# EAGLE board PIC Uhrfinal (EAGLE 7.5.0)
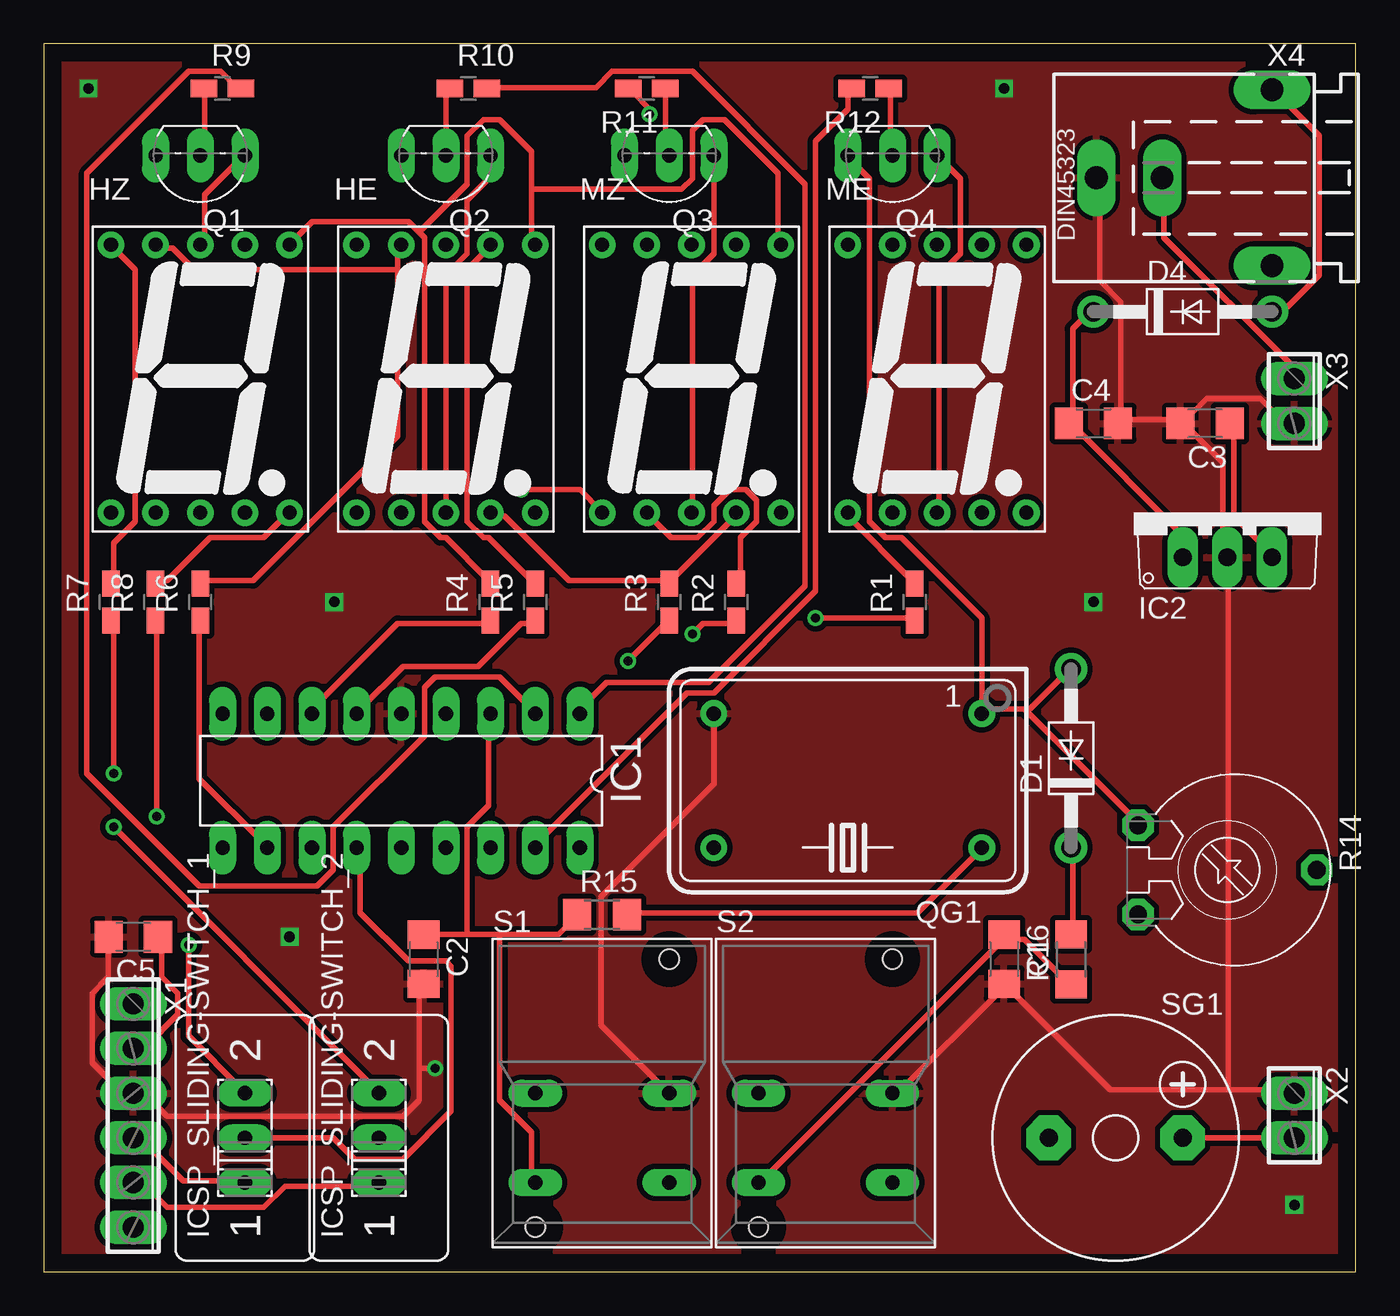
[diagram p0: board, top side]
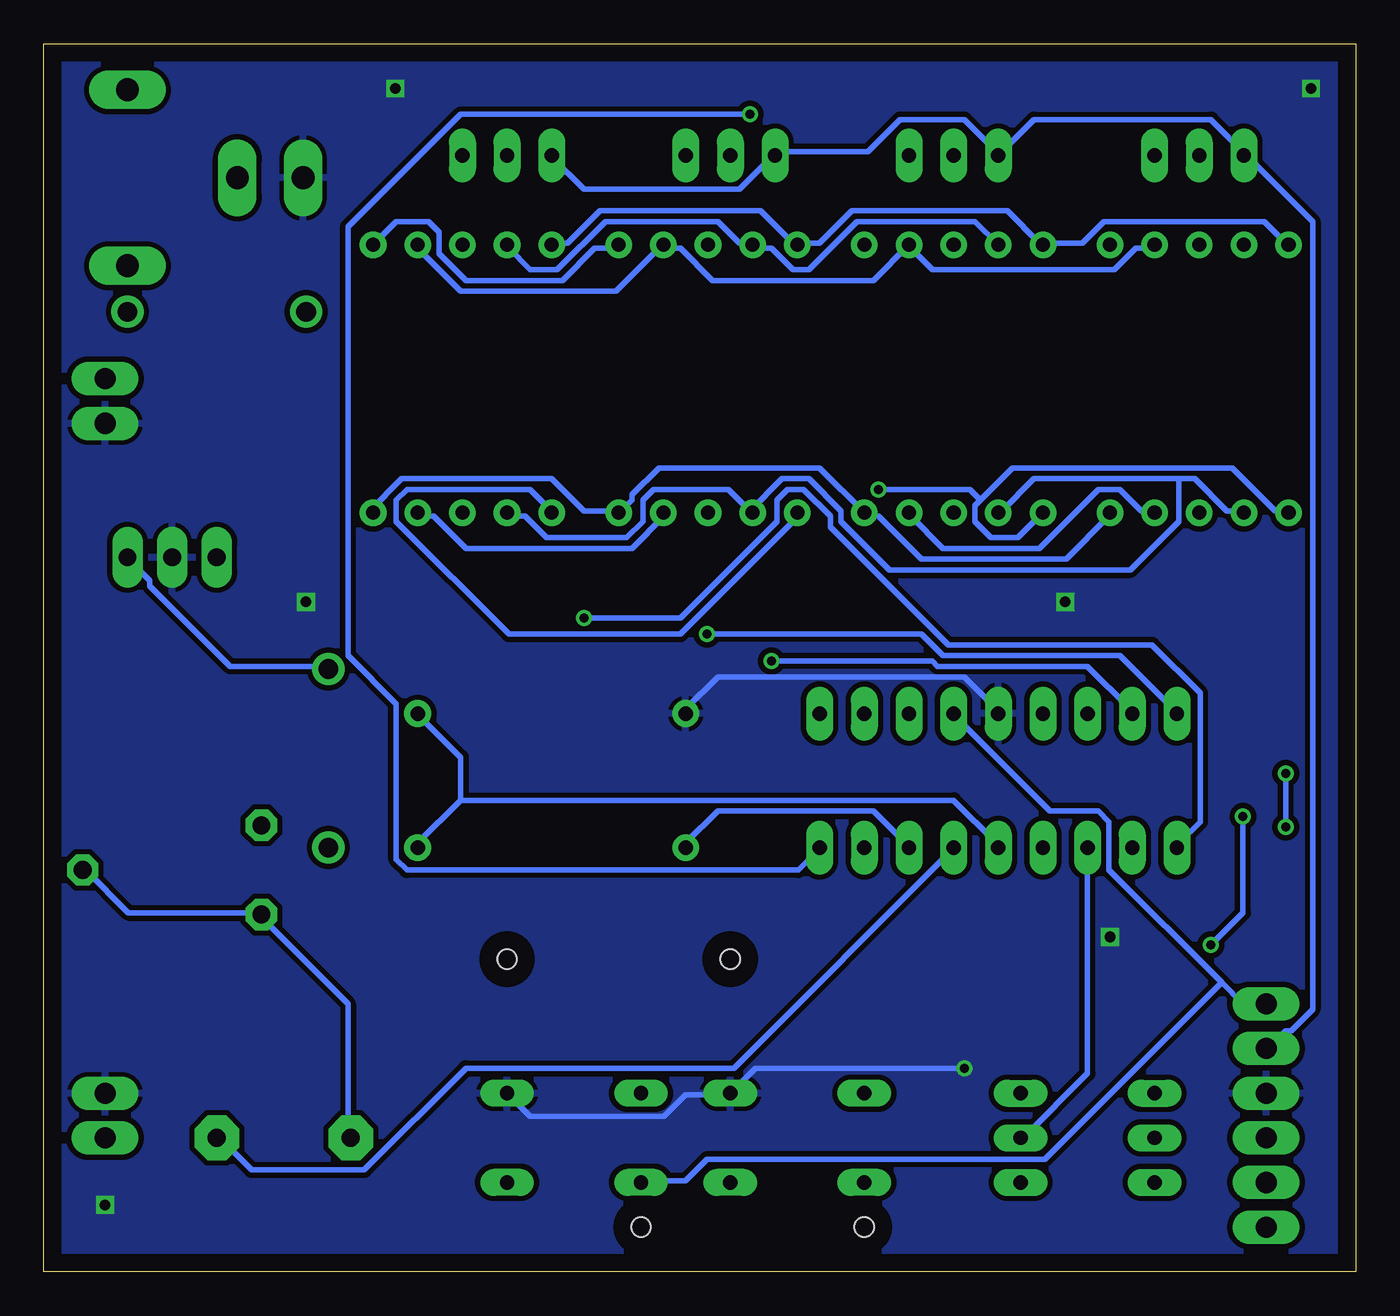
[diagram p1: board, bottom side, seen from below]

Size 74.6 x 69.84 mm. Coordinates in mm from the lower left corner, seen from the top.
Outline: 0,0 74.6,0 74.6,69.84 0,69.84 0,0
Copper layers (1*16): Top 0.035mm / dielectric 1.5mm / Bottom 0.035mm
Design rules "default *": minimum track width 12mil, minimum drill 20mil, track to track 12mil, track to pad 10mil, pad to pad 10mil, via to via 10mil, smd to smd 8mil, copper to edge 40mil, drill to drill 8mil, minimum pad ring 14mil, minimum via ring 8mil, stop-mask expansion 4mil, vias tented up to drill 0mil, thermal gap 10mil

## Footprints (pad centres in the part's own frame; a part is rotated, then mirrored left to right if it is on the bottom)
C1206 = smd 1.6 x 1.8: 1 -1.4,0; 2 1.4,0
DO41-10 = drill 1.118: A 5.08,0; C -5.08,0
SA52-11 = drill 0.8: 1 -5.08,-7.62; 2 -2.54,-7.62; 3 0,-7.62; 4 2.54,-7.62; 5 5.08,-7.62; 6 5.08,7.62; 7 2.54,7.62; 8 0,7.62; 9 -2.54,7.62; 10 -5.08,7.62
DIL18 = drill 0.813 long: 1 -10.16,-3.81; 2 -7.62,-3.81; 3 -5.08,-3.81; 4 -2.54,-3.81; 5 0,-3.81; 6 2.54,-3.81; 7 5.08,-3.81; 8 7.62,-3.81; 9 10.16,-3.81; 10 10.16,3.81; 11 7.62,3.81; 12 5.08,3.81; 13 2.54,3.81; 14 0,3.81; 15 -2.54,3.81; 16 -5.08,3.81; 17 -7.62,3.81; 18 -10.16,3.81
TO220V = drill 1.016 long: 1 -2.54,-2.54; 2 0,-2.54; 3 2.54,-2.54
M251 = drill 0.813 long: 1 -2.54,0; 2 0,0; 3 2.54,0
TO92-EBC = drill 0.813 long: B 0,-1.27; C -2.54,-1.27; E 2.54,-1.27
DIL14S = drill 0.813: 1 -7.62,-3.81; 7 7.62,-3.81; 8 7.62,3.81; 14 -7.62,3.81
R0805W = smd 1.5 x 1: 1 -1.052,0; 2 1.052,0
PT-10 = drill 1.016 pad 1.778 octagon: 1 -2.54,-5.08; 2 2.54,-5.08; 3 0,5.08
R1206 = smd 1.6 x 1.803: 1 -1.422,0; 2 1.422,0
SRK = drill 0.813 long: 1 -3.81,-5.08; 2 -3.81,0; 3 3.81,0; 4 3.81,-5.08 | hole 1.118: -3.81,-7.62; 3.81,7.62
F/CM12P = drill 1.016 pad 2.54 octagon: + 3.81,0; - -3.81,0
6POL254 = drill 1.2 pad 1.778 long: 1 -6.35,0; 2 -3.81,0; 3 -1.27,0; 4 1.27,0; 5 3.81,0; 6 6.35,0
2POL254 = drill 1.2 long: 1 -1.27,0; 2 1.27,0
737992-5 = drill 1.3 pad 2.184 long: + 0,10; -1 5,0; -2 -5,0; K 0,6.25

## Placement (x,y rotation side)
C1  100n  [C1206]  54.61,17.78 270 top
C2  100n  [C1206]  21.59,17.78 270 top
C3  0,33µ  [C1206]  66.04,48.26 180 top
C4  0,33µ  [C1206]  59.69,48.26 0 top
C5  100n  [C1206]  5.08,19.05 180 top
D1  BAT49  [DO41-10]  58.42,29.21 90 top
D4  BAT49  [DO41-10]  64.77,54.61 0 top
HE  7-SEG_SA52-11  [SA52-11]  22.86,50.8 0 top
HZ  7-SEG_SA52-11  [SA52-11]  8.89,50.8 0 top
IC1  PIC16F1826/27P  [DIL18]  20.32,27.94 180 top
IC2  7805TV  [TO220V]  67.31,43.18 0 top
ICSP_SLIDING-SWITCH_1  _1  [M251]  11.43,7.62 90 top
ICSP_SLIDING-SWITCH_2  _2  [M251]  19.05,7.62 90 top
ME  7-SEG_SA52-11  [SA52-11]  50.8,50.8 0 top
MZ  7-SEG_SA52-11  [SA52-11]  36.83,50.8 0 top
Q1  BC557B  [TO92-EBC]  8.89,62.23 180 top
Q2  BC557B  [TO92-EBC]  22.86,62.23 180 top
Q3  BC557B  [TO92-EBC]  35.56,62.23 180 top
Q4  BC557B  [TO92-EBC]  48.26,62.23 180 top
QG1  8 Mhz  [DIL14S]  45.72,27.94 180 top
R1  1,5k  [R0805W]  49.53,38.1 90 top
R2  1,5k  [R0805W]  39.37,38.1 90 top
R3  1,5k  [R0805W]  35.56,38.1 90 top
R4  1,5k  [R0805W]  25.4,38.1 90 top
R5  1,5k  [R0805W]  27.94,38.1 90 top
R6  1,5k  [R0805W]  8.89,38.1 90 top
R7  1,5k  [R0805W]  3.81,38.1 90 top
R8  1,5k  [R0805W]  6.35,38.1 90 top
R9  2k  [R0805W]  10.16,67.31 0 top
R10  2k  [R0805W]  24.13,67.31 0 top
R11  2k  [R0805W]  34.29,67.31 180 top
R12  2k  [R0805W]  46.99,67.31 180 top
R14  25k  [PT-10]  67.31,22.86 270 top
R15  10k  [R1206]  31.75,20.32 0 top
R16  10k  [R1206]  58.42,17.78 90 top
S1  SRK  [SRK]  31.75,10.16 0 top
S2  SRK  [SRK]  44.45,10.16 0 top
SG1  F/CM12P  [F/CM12P]  60.96,7.62 0 top
X1  [6POL254]  5.08,8.89 270 top
X2  [2POL254]  71.12,8.89 270 top
X3  +9V  [2POL254]  71.12,49.53 270 top
X4  +9V  [737992-5]  69.85,62.23 90 top

## Library data of the parts
C1-C5 R1-R12 R14-R16 = rcl
D1 D4 = diode
HE HZ ME MZ = display-kingbright; OC_FARNELL: unknown; OC_NEWARK: unknown
IC1 = microchip
IC2 = linear
ICSP_SLIDING-SWITCH_1 ICSP_SLIDING-SWITCH_2 = switch
Q1-Q4 = transistor-pnp
QG1 = crystal; OC_FARNELL: unknown; OC_NEWARK: unknown
S1 S2 = switch-misc
SG1 = buzzer; OC_FARNELL: unknown; OC_NEWARK: unknown
X1-X3 = con-phoenix-254; OC_FARNELL: unknown; OC_NEWARK: unknown
X4 = con-conrad

## Nets
+5V: C3.1 C5.1 D1.A IC1.14 IC2.3 Q1.E Q2.E Q3.E Q4.E QG1.1 QG1.14 R14.1 R15.2 X1.2
BUZZER: IC1.15 SG1.+ X2.2
CLKI: IC1.16 QG1.8
GND: C1.2 C2.2 C3.2 C4.2 C5.2 IC1.5 IC2.2 QG1.7 S1.3 S2.3 X1.3 X2.1 X3.2 X4.+
N$1: HZ.8 Q1.C
N$2: Q1.B R9.1
N$3: Q2.B R10.1
N$4: Q3.B R11.1
N$5: HE.3 Q2.C
N$6: MZ.3 Q3.C
N$7: ME.3 Q4.C
N$8: IC1.2 R9.2
N$9: IC1.1 R10.2
N$10: HE.10 HZ.10 ME.10 MZ.10 R7.2
N$11: IC1.18 R11.2
N$12: IC1.17 R12.2
N$13: Q4.B R12.1
N$14: HE.5 HZ.5 ME.5 MZ.5 R8.2
N$15: HE.9 HZ.9 ME.9 MZ.9 R6.2
N$16: HE.7 HZ.7 ME.7 MZ.7 R5.2
N$17: C4.1 D4.C IC2.1
N$18: D4.A X4.-1
N$19: HE.1 HZ.1 ME.1 MZ.1 R1.2
N$20: IC1.11 R6.1
N$21: IC1.10 R1.1
N$22: IC1.9 R2.1
N$23: HE.2 HZ.2 ME.2 MZ.2 R2.2
N$24: HE.4 HZ.4 ME.4 MZ.4 R3.2
N$26: IC1.8 R3.1
N$27: IC1.7 R4.1
N$28: IC1.6 R5.1
N$30: ICSP_SLIDING-SWITCH_2.3 R7.1
N$31: IC1.13 ICSP_SLIDING-SWITCH_1.2
N$32: IC1.12 ICSP_SLIDING-SWITCH_2.2
N$33: ICSP_SLIDING-SWITCH_1.3 R8.1
N$35: ICSP_SLIDING-SWITCH_1.1 X1.4
N$36: ICSP_SLIDING-SWITCH_2.1 X1.5
N$37: R14.2 R14.3 SG1.-
N$39: X3.1 X4.K
N$40: D1.C R16.2
N$41: HE.6 HZ.6 ME.6 MZ.6 R4.2
RA4: C2.1 IC1.3 R15.1 S1.1
RA5: C1.1 IC1.4 R16.1 S2.1 X1.1

## Tracks (layer width: path | path; a pad name or v marks a point on that pad's centre or on a via)
+5V
  Top 0.305: R15.2 33.22,20.42 49.68,20.42 53.34,24.08 QG1.14 | C3.1 67.67,48.16 67.67,42.98 69.8,40.84 IC2.3 | 55.78,32 56.08,32 58.22,34.14 D1.A | 55.78,32 53.34,32 | 55.78,32 62.18,25.6 R14.1 | C5.1 6.71,18.9 6.71,16.76 7.62,15.85 7.62,14.63 5.79,12.8 5.18,12.8 X1.2 | 53.34,32 53.34,37.19 48.77,41.76 47.85,41.76 46.94,42.67 46.94,62.18 45.72,63.4 Q4.E | 53.34,32 QG1.1
  Bottom 0.305: 50.9,26.82 22.86,26.82 20.42,24.38 IC1.14 | 50.9,26.82 53.34,24.38 QG1.14 | IC2.3 69.8,40.54 68.58,39.32 68.58,39.01 64.01,34.44 58.52,34.44 D1.A | 50.9,26.82 50.9,29.26 53.34,31.7 QG1.1 | Q4.E 45.72,63.4 43.89,61.57 35.05,61.57 33.22,63.4 Q3.E 32.92,63.7 27.74,63.7 25.91,65.53 22.25,65.53 20.42,63.7 Q2.E 18.29,65.53 8.23,65.53 6.4,63.7 Q1.E 6.1,63.4 2.44,59.74 2.44,14.94 3.66,13.72 3.96,13.72 4.88,12.8 X1.2
BUZZER
  Top 0.305: SG1.+ X2.2
  Bottom 0.305: IC1.15 22.86,24.08 35.36,11.58 50.6,11.58 56.39,5.79 62.79,5.79 64.62,7.62 SG1.+
CLKI
  Bottom 0.305: IC1.16 25.6,24.38 27.43,26.21 36.27,26.21 38.1,24.38 QG1.8
GND  (via drill 0.51, 0.6)
  Top 0.305: 61.27,48.46 64.62,48.46 C3.2 | C3.2 64.92,48.46 66.14,49.68 69.19,49.68 70.41,48.46 71.02,48.46 X3.2 | C3.2 64.92,48.16 67.06,46.02 67.06,40.84 IC2.2 67.36,40.54 67.36,10.36 | 61.27,48.46 61.27,55.17 60.05,56.39 60.05,62.18 X4.+ | 61.27,48.46 C4.2 | 21.34,11.58 21.34,9.75 20.42,8.84 7.01,8.84 5.79,10.06 5.18,10.06 X1.3 4.88,10.36 4.27,10.36 2.74,11.89 2.74,15.85 3.66,16.76 3.66,18.9 C5.2 | 21.34,11.58 21.34,16.15 C2.2 | S2.3 48.46,10.06 54.56,16.15 C1.2 54.86,16.15 60.66,10.36 67.36,10.36 | 67.36,10.36 71.02,10.36 X2.1 | QG1.7 38.1,27.74 31.7,21.34 31.7,14.02 S1.3 | v22.25,11.58 21.34,11.58
  Bottom 0.305: IC1.5 20.42,32 22.25,33.83 36.27,33.83 38.1,32 QG1.7 | S2.3 46.94,8.84 39.32,8.84 38.1,10.06 35.66,10.06 S1.3 34.14,11.58 v22.25,11.58
  other vias: 2.54,67.31 54.61,67.31 16.51,38.1 13.97,19.05 59.69,38.1 71.12,3.81
  pour Bottom (isolate 0.016): 0,69.85 74.93,69.85 74.93,0 0,0
  pour Top (isolate 0.016): 0,69.85 74.93,69.85 74.93,0 0,0
N$1
  Top 0.305: HZ.8 9.14,58.52 9.14,61.27 11.28,63.4 Q1.C
N$2
  Top 0.305: R9.1 9.14,67.06 9.14,63.7 Q1.B
N$3
  Top 0.305: Q2.B 22.86,67.06 R10.1
N$4
  Top 0.305: R11.1 35.36,67.06 35.36,63.7 Q3.B
N$5
  Top 0.305: HE.3 22.86,56.69 24.08,57.91 24.08,60.96 25.3,62.18 25.3,63.4 Q2.C
N$6
  Top 0.305: Q3.C 38.1,57.91 36.88,56.69 36.88,43.28 MZ.3
N$7
  Top 0.305: Q4.C 52.12,62.18 52.12,57.91 50.9,56.69 50.9,43.28 ME.3
N$8
  Top 0.305: R9.2 10.97,67.36 10.06,68.28 8.23,68.28 2.44,62.48 2.44,28.35 8.84,21.95 15.54,21.95 16.46,22.86 16.46,25.3 21.64,30.48 21.64,33.22 22.25,33.83 25.91,33.83 27.74,32 IC1.2
N$9
  Top 0.305: R10.2 25.3,67.36 31.39,67.36 32.31,68.28 36.88,68.28 43.28,61.87 43.28,39.01 37.8,33.53 32,33.53 30.48,32 IC1.1
N$10
  Top 0.305: R7.2 3.96,39.32 3.96,41.45 5.18,42.67 5.18,57 3.96,58.22 HZ.10
  Bottom 0.305: HZ.10 3.96,58.52 5.18,59.74 14.33,59.74 15.54,58.52 17.68,58.52 HE.10 17.98,58.52 19.81,60.35 28.65,60.35 30.48,58.52 31.7,58.52 MZ.10 32,58.52 33.83,60.35 42.98,60.35 44.81,58.52 45.72,58.52 ME.10
N$11  (via drill 0.51)
  Top 0.305: v34.44,65.84 34.44,66.14 33.53,67.06 R11.2
  Bottom 0.305: v34.44,65.84 50.9,65.84 57.3,59.44 57.3,35.05 54.56,32.31 54.56,23.47 53.95,22.86 31.7,22.86 30.48,24.08 IC1.18
N$12
  Top 0.305: R12.2 45.72,67.06 45.72,66.14 43.89,64.31 43.89,38.71 38.1,32.92 36.58,32.92 28.04,24.38 IC1.17
N$13
  Top 0.305: R12.1 48.16,67.06 48.16,63.7 Q4.B
N$14
  Top 0.305: R8.2 6.4,39.32 7.01,39.32 9.45,41.76 12.5,41.76 13.72,42.98 HZ.5
  Bottom 0.305: ME.5 56.08,43.28 54.25,45.11 45.72,45.11 43.89,43.28 42.06,43.28 MZ.5 41.76,43.28 41.15,43.89 41.15,44.2 39.62,45.72 30.48,45.72 HE.5 27.74,42.98 27.13,42.98 24.69,40.54 16.46,40.54 14.02,42.98 HZ.5
N$15
  Top 0.305: 20.12,57 20.12,58.22 HE.9 | 20.12,57 20.12,47.55 11.89,39.32 9.14,39.32 R6.2 | 20.12,57 8.53,57 7.32,58.22 6.4,58.22 HZ.9
  Bottom 0.305: ME.9 48.16,58.22 46.94,57 45.41,57 42.67,59.74 36.27,59.74 35.05,58.52 34.44,58.52 MZ.9 34.14,58.22 33.22,58.22 32,57 31.09,57 28.35,59.74 21.64,59.74 HE.9
N$16
  Top 0.305: R5.2 27.74,39.32 25.3,41.76 24.99,41.76 24.08,42.67 24.08,57 25.3,58.22 HE.7
  Bottom 0.305: HZ.7 11.58,58.22 12.5,58.22 13.72,57 24.08,57 25.3,58.22 HE.7 27.43,56.39 36.58,56.39 38.41,58.22 39.32,58.22 MZ.7 39.62,58.22 42.06,55.78 50.9,55.78 53.34,58.22 ME.7
N$17
  Top 0.305: D4.C 59.44,54.56 58.52,53.65 58.52,48.46 C4.1 58.52,48.16 64.62,42.06 64.62,40.84 IC2.1
N$18
  Top 0.305: D4.A 70.1,54.86 70.71,54.86 72.54,56.69 72.54,64.62 70.1,67.06 X4.-1
N$19  (via drill 0.51)
  Top 0.305: R1.2 49.38,39.32 45.72,42.98 ME.1 | v27.13,44.5 30.48,44.5 31.7,43.28 MZ.1
  Bottom 0.305: 21.34,43.89 21.64,43.59 21.64,42.67 20.73,41.76 19.2,41.76 HE.1 | 21.34,43.89 19.51,45.72 7.01,45.72 4.57,43.28 3.96,43.28 HZ.1 | MZ.1 32,42.98 32,42.67 38.41,36.27 48.16,36.27 54.56,42.67 54.56,43.89 53.95,44.5 46.94,44.5 45.72,43.28 ME.1 | 21.34,43.89 21.95,44.5 v27.13,44.5
N$20
  Top 0.305: R6.1 8.84,36.88 8.84,28.04 12.5,24.38 IC1.11
N$21  (via drill 0.51)
  Top 0.305: v43.89,37.19 49.38,37.19 R1.1
  Bottom 0.305: v43.89,37.19 38.41,37.19 32.92,42.67 32.92,43.89 32.31,44.5 31.39,44.5 29.87,42.98 29.87,42.37 23.16,35.66 11.58,35.66 8.84,32.92 8.84,25.6 10.06,24.38 IC1.10
N$22  (via drill 0.51)
  Top 0.305: v36.88,36.27 37.49,36.88 39.32,36.88 R2.1
  Bottom 0.305: v36.88,36.27 24.69,36.27 23.47,35.05 13.41,35.05 10.36,32 IC1.9
N$23
  Top 0.305: R2.2 39.62,39.32 39.62,41.76 40.54,42.67 40.54,43.89 39.93,44.5 39.01,44.5 38.1,43.59 38.1,42.67 37.19,41.76 35.66,41.76 34.44,42.98 MZ.2
  Bottom 0.305: 10.06,45.11 18.29,45.11 20.12,43.28 HE.2 | 10.06,45.11 9.14,45.11 7.32,43.28 6.4,43.28 HZ.2 | 34.44,43.28 35.66,44.5 39.93,44.5 40.54,43.89 40.54,42.67 41.45,41.76 46.02,41.76 47.24,42.98 48.16,42.98 ME.2 | 10.06,45.11 10.06,42.67 12.8,39.93 26.52,39.93 29.26,42.67 29.26,43.28 31.09,45.11 32.61,45.11 34.44,43.28 | 34.44,43.28 MZ.2
N$24
  Top 0.305: MZ.4 39.32,42.98 35.66,39.32 R3.2 35.36,39.32 29.87,39.32 26.21,42.98 25.6,42.98 HE.4
  Bottom 0.305: HZ.4 11.58,43.28 12.19,43.28 13.41,44.5 14.63,44.5 17.98,41.15 23.47,41.15 25.3,42.98 HE.4 | ME.4 53.34,42.98 52.43,42.98 50.6,41.15 41.15,41.15 39.32,42.98 MZ.4
N$26  (via drill 0.51)
  Top 0.305: v33.22,34.75 35.36,36.88 R3.1
  Bottom 0.305: v33.22,34.75 24.08,34.75 23.77,34.44 15.24,34.44 12.8,32 IC1.8
N$27
  Top 0.305: R4.1 25.3,36.88 20.12,36.88 15.24,32 IC1.7
N$28
  Top 0.305: R5.1 27.74,36.88 27.13,36.88 24.69,34.44 20.42,34.44 17.98,32 IC1.6
N$30  (via drill 0.51)
  Top 0.305: v3.96,28.35 3.96,36.88 R7.1 | v3.96,25.3 18.9,10.36 ICSP_SLIDING-SWITCH_2.3
  Bottom 0.305: v3.96,25.3 v3.96,28.35
N$31
  Top 0.305: ICSP_SLIDING-SWITCH_1.2 16.46,7.62 17.68,6.4 20.42,6.4 23.16,9.14 23.16,17.37 22.86,17.68 20.73,17.68 17.98,20.42 17.98,24.08 IC1.13
N$32
  Bottom 0.305: IC1.12 15.24,11.28 18.9,7.62 ICSP_SLIDING-SWITCH_2.2
N$33  (via drill 0.51)
  Top 0.305: v6.4,25.91 6.4,36.88 R8.1 | v8.23,18.59 8.23,13.41 11.28,10.36 ICSP_SLIDING-SWITCH_1.3
  Bottom 0.305: v6.4,25.91 6.4,20.42 v8.23,18.59
N$35
  Top 0.305: X1.4 5.49,7.62 7.92,5.18 11.28,5.18 ICSP_SLIDING-SWITCH_1.1
N$36
  Top 0.305: ICSP_SLIDING-SWITCH_2.1 18.9,4.88 13.72,4.88 12.5,3.66 7.01,3.66 5.79,4.88 5.18,4.88 X1.5
N$37
  Bottom 0.305: R14.3 72.24,22.86 69.8,20.42 62.48,20.42 R14.2 62.18,20.12 57.3,15.24 57.3,7.62 SG1.-
N$39
  Top 0.305: X3.1 71.02,50.9 71.02,51.51 63.7,58.83 63.7,62.18 X4.K
N$40
  Top 0.305: R16.2 58.52,19.2 58.52,24.08 D1.C
N$41
  Top 0.305: 21.34,59.13 20.73,59.74 15.24,59.74 14.02,58.52 HZ.6 | 21.34,59.13 21.64,58.83 21.64,42.67 22.55,41.76 22.86,41.76 25.3,39.32 R4.2 | 27.74,61.57 27.74,63.7 25.91,65.53 24.99,65.53 24.08,64.62 24.08,61.87 21.34,59.13 | 27.74,61.57 27.74,58.52 HE.6 | 27.74,61.57 36.27,61.57 36.88,62.18 36.88,64.92 37.49,65.53 38.71,65.53 41.76,62.48 41.76,58.52 MZ.6
  Bottom 0.305: ME.6 54.56,59.74 52.73,59.74 52.12,59.13 52.12,57.91 50.6,56.39 45.11,56.39 43.28,58.22 42.06,58.22 MZ.6
RA4
  Top 0.305: 25.91,19.2 29.26,19.2 30.18,20.12 R15.1 | 25.91,19.2 24.08,19.2 | 24.08,19.2 21.64,19.2 C2.1 | 25.91,19.2 25.91,9.75 27.74,7.92 27.74,5.18 S1.1 | 24.08,19.2 24.08,25.3 25.3,26.52 25.3,31.7 IC1.3
RA5
  Top 0.305: R16.1 58.22,16.46 55.78,18.9 54.86,18.9 C1.1 54.56,18.9 40.84,5.18 S2.1
  Bottom 0.305: 7.62,16.46 6.4,15.24 X1.1 | 7.62,16.46 14.02,22.86 14.02,25.6 14.63,26.21 17.37,26.21 22.86,31.7 IC1.4 | 7.62,16.46 17.68,6.4 36.88,6.4 38.1,5.18 40.54,5.18 S2.1